# EAGLE board E_KEYPAD_2_2 (EAGLE 6.4)
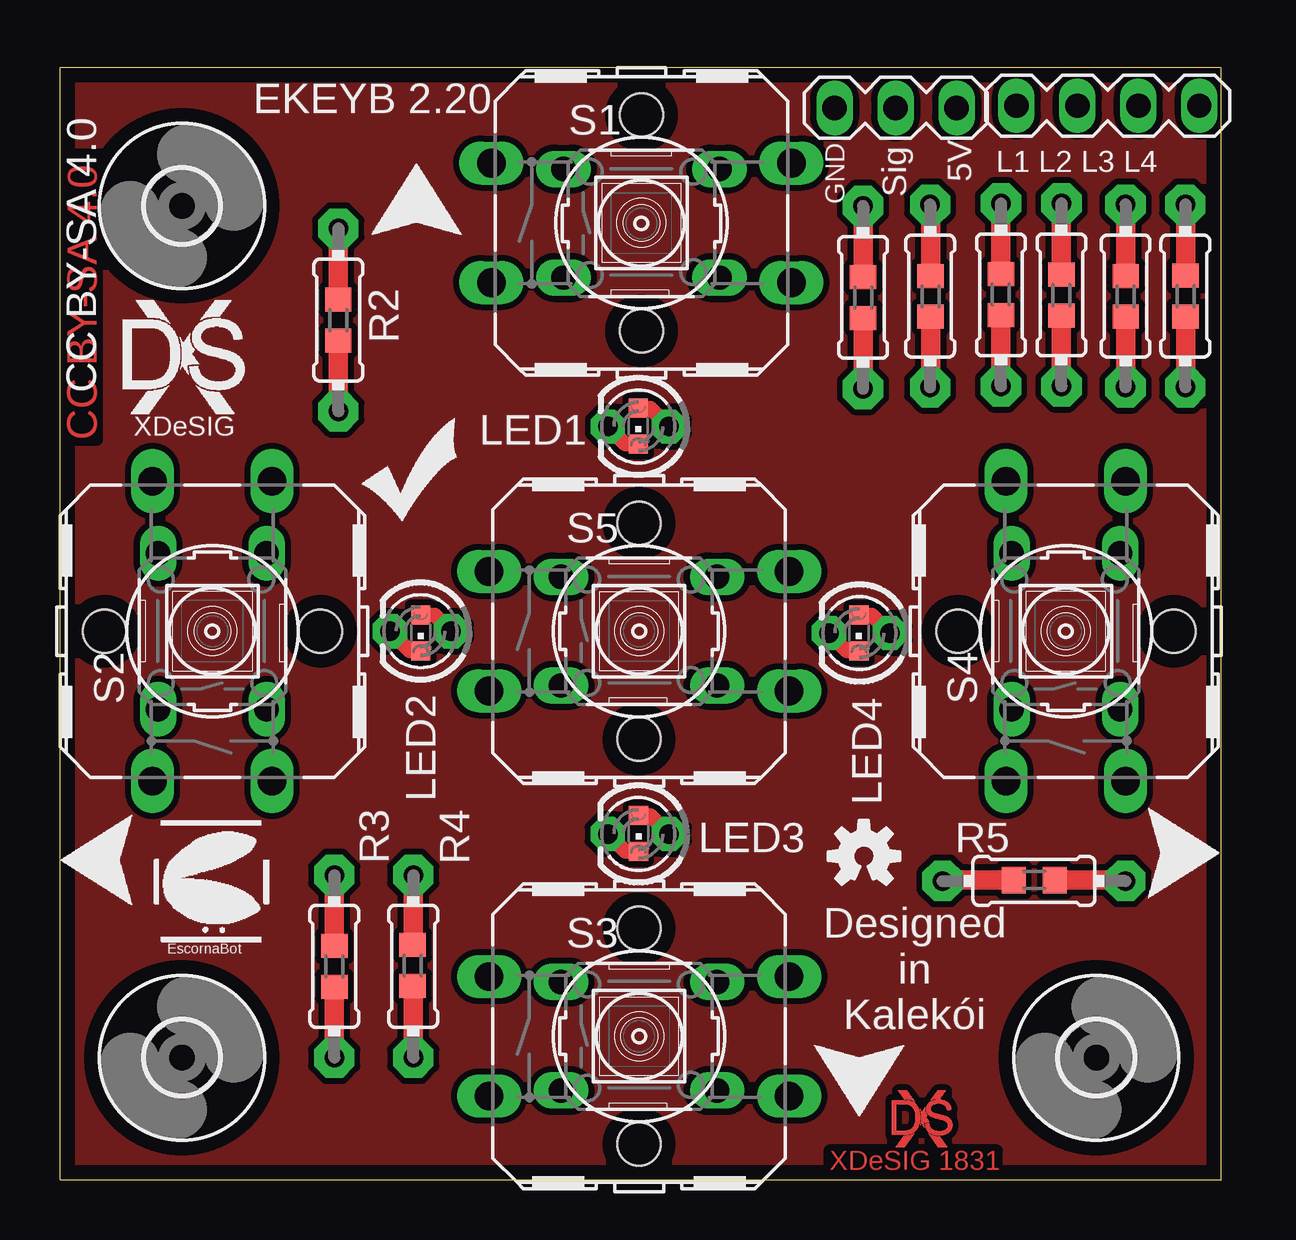
[diagram p0: board, top side]
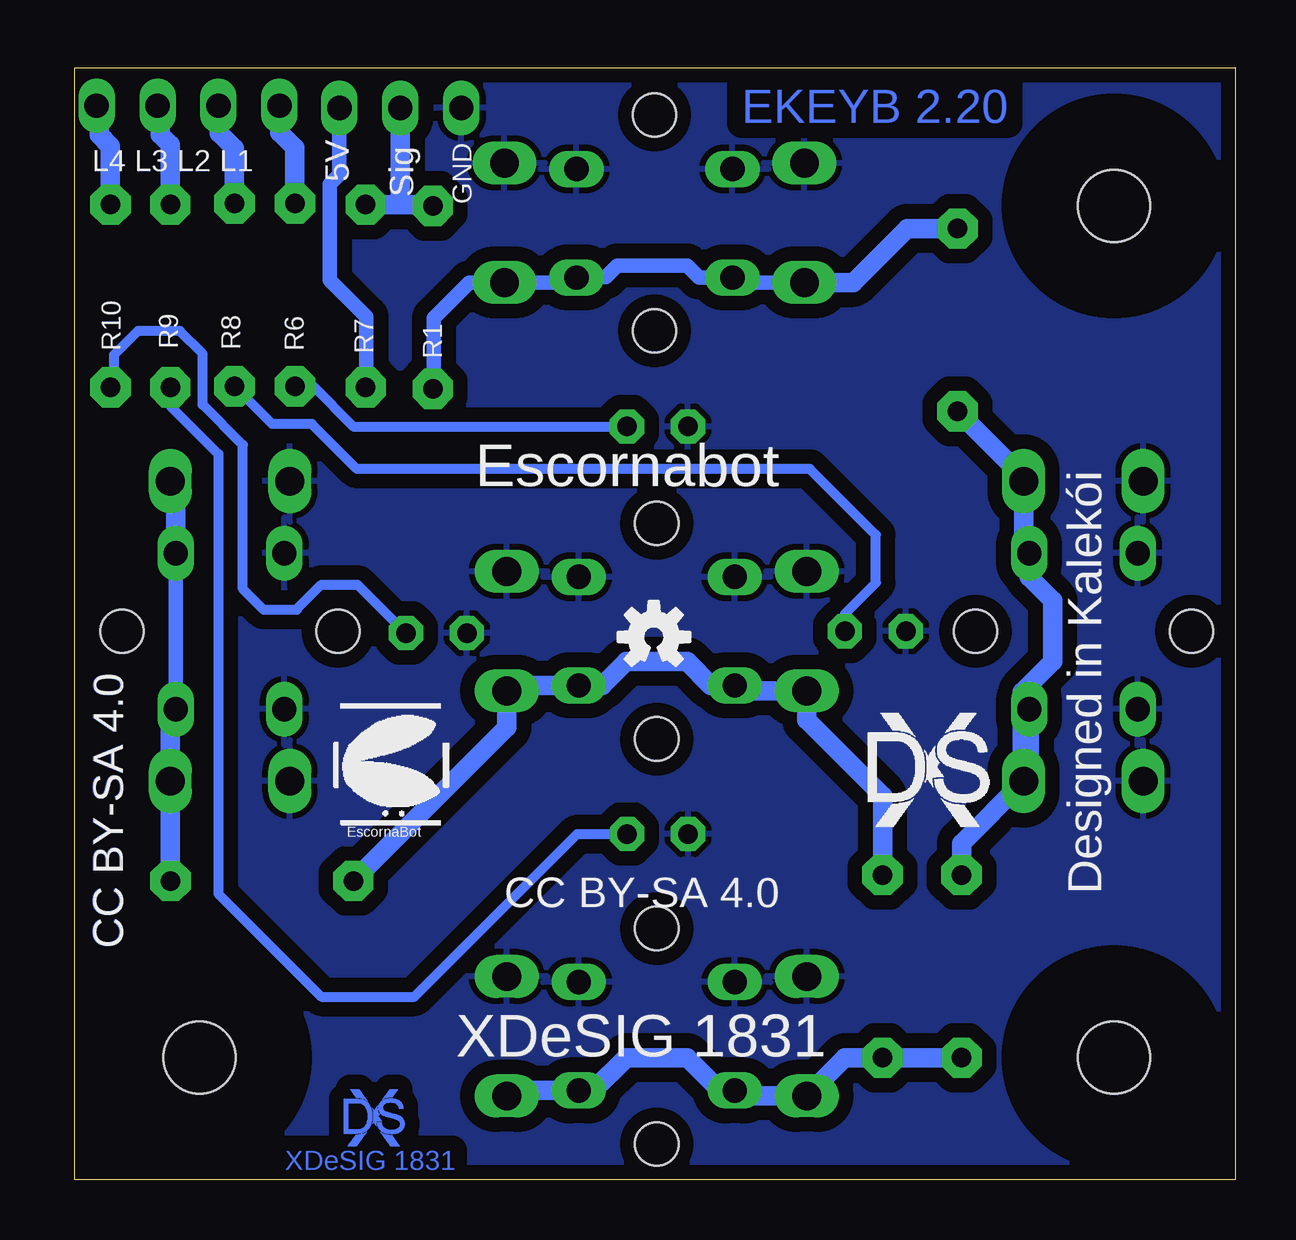
[diagram p1: board, bottom side, seen from below]

Size 48.38 x 46.38 mm. Coordinates in mm from the lower left corner, seen from the top.
Outline: 0,46.34 48.38,46.34 48.38,0 0,0 0,46.38
Copper layers (1*16): Top 0.035mm / dielectric 1.5mm / Bottom 0.035mm
Design rules "default": minimum track width 10mil, minimum drill 22mil, track to track 10mil, track to pad 10mil, pad to pad 8mil, via to via 12mil, smd to smd 8mil, copper to edge 24mil, drill to drill 12mil, minimum pad ring 10mil, minimum via ring 10mil, stop-mask expansion 2mil, vias tented up to drill 30mil, thermal gap 10mil
Net classes: 0 default: width 0.254 mm, drill 0.61 mm, clearance 0.254 mm

## Footprints (pad centres in the part's own frame; a part is rotated, then mirrored left to right if it is on the bottom)
3,0 = hole 3: 0,0
LED3MM = drill 0.813 pad 1.422 octagon: A -1.27,0; K 1.27,0
CHIPLED_0603 = smd 0.8 x 0.8: A 0,-0.75; C 0,0.75
0204/7 = drill 0.813 pad 1.676 octagon: 1 -3.81,0; 2 3.81,0
R0603 = smd 1 x 1.1: 1 -0.85,0; 2 0.85,0
B3F-10XX = drill 1.016 long: 1 -3.251,2.261; 2 3.251,2.261; 3 -3.251,-2.261; 4 3.251,-2.261
B3F-40XX = drill 1.194 pad 1.676 long: 1 -6.248,2.489; 2 6.248,2.489; 3 -6.248,-2.489; 4 6.248,-2.489 | hole 1.803: 0,-4.496; 0,4.496
MA04-1 = drill 1.016 long: 1 -3.81,0; 2 -1.27,0; 3 1.27,0; 4 3.81,0
MA03-1 = drill 1.016 pad 1.27 long: 1 -2.54,0; 2 0,0; 3 2.54,0

## Placement (x,y rotation side)
H1  HOLE3.0  [3,0]  5.08,40.59 0 top
H2  HOLE3.0  [3,0]  43.18,5.08 0 top
H3  HOLE3.0  [3,0]  5.08,5.08 0 top
LED1  [LED3MM]  24.1,31.39 180 top
LED1.1  [CHIPLED_0603]  24.09,31.41 180 top
LED2  [LED3MM]  15.02,22.86 180 top
LED2.1  [CHIPLED_0603]  15.04,22.79 180 top
LED3  [LED3MM]  24.09,14.4 180 top
LED3.1  [CHIPLED_0603]  24.11,14.44 180 top
LED4  [LED3MM]  33.31,22.78 180 top
LED4.1  [CHIPLED_0603]  33.29,22.79 180 top
LOGO1  OSHW-LOGOS  [OSHW-LOGO-S]  33.49,13.48 0 top
LOGO2  OSHW-LOGOS  [OSHW-LOGO-S]  24.25,22.61 0 bottom
R1  10K  [0204/7]  33.46,36.77 90 top
R1.1  10K  [R0603]  33.47,36.77 90 top
R2  10K  [0204/7]  11.6,35.83 90 top
R2.1  10K  [R0603]  11.6,35.83 90 top
R3  10K  [0204/7]  11.43,8.89 90 top
R3.1  10K  [R0603]  11.43,8.89 90 top
R4  10K  [0204/7]  14.72,8.89 270 top
R4.1  10K  [R0603]  14.7,8.93 270 top
R5  22K  [0204/7]  40.58,12.45 180 top
R5.1  22K  [R0603]  40.59,12.49 180 top
R6  1K  [0204/7]  39.2,36.88 270 top
R6.1  1K  [R0603]  39.2,36.9 270 top
R7  10K  [0204/7]  36.26,36.83 90 top
R7.1  10K  [R0603]  36.27,36.82 90 top
R8  1K  [0204/7]  41.73,36.88 270 top
R8.1  1K  [R0603]  41.73,36.87 270 top
R9  1K  [0204/7]  44.4,36.83 270 top
R9.1  1K  [R0603]  44.41,36.82 270 top
R10  1K  [0204/7]  46.89,36.83 90 top
R10.1  1K  [R0603]  46.9,36.83 270 top
S1  [B3F-10XX]  24.23,39.86 0 top
S1.1  [B3F-40XX]  24.23,39.88 0 top
S2  [B3F-10XX]  6.35,22.86 90 top
S2.1  [B3F-40XX]  6.35,22.86 90 top
S3  [B3F-10XX]  24.13,5.97 0 top
S3.1  [B3F-40XX]  24.13,5.97 0 top
S4  [B3F-10XX]  41.91,22.86 90 top
S4.1  [B3F-40XX]  41.91,22.86 90 top
S5  [B3F-10XX]  24.13,22.86 0 top
S5.1  [B3F-40XX]  24.13,22.86 0 top
SV1  [MA04-1]  43.66,44.77 0 top
SV2  [MA03-1]  34.81,44.67 180 top
U$1  ESCORNABOT  [ESCORNA_PEQUE]  37.67,14.7 0 bottom
U$2  ESCORNABOT  [ESCORNA_PEQUE]  3.84,9.83 0 top
U$3  FRECHA  [FRECHA]  3.04,15.24 180 top
U$4  FRECHA  [FRECHA]  16.78,39.34 90 top
U$5  GO  [VALE]  12.53,27.41 0 top
U$6  FRECHA  [FRECHA]  31.38,5.64 270 top
U$7  XDESIG21  [XDESIG]  15.33,14.71 0 bottom
U$8  XDESIG  [XDESIG_CU_2]  34.66,1.35 0 top
U$9  XDESIG21  [XDESIG]  2.63,31.93 0 top
U$10  XDESIG  [XDESIG_CU_2]  37.16,1.4 0 bottom
U$11  FRECHA  [FRECHA]  45.3,11.69 0 top

## Library data of the parts
H1-H3 = holes
LED1 LED1.1 LED2 LED2.1 LED3 LED3.1 LED4 LED4.1 = adafruit
LOGO1 LOGO2 = SparkFun-Aesthetics
R1 R1.1 R2 R2.1 R3 R3.1 R4 R4.1 R5 R5.1 R6 R6.1 R7 R7.1 R8 R8.1 R9 R9.1 R10 R10.1 = rcl
S1-S5 = switch-omron; MPN: B3F-1000; OC_FARNELL: 176432; OC_NEWARK: 36M3542
S1.1 S2.1 S3.1 S4.1 S5.1 = switch-omron; MF: OMRON COMPONENTS USA; MPN: B3F-4000; OC_FARNELL: 176434; OC_NEWARK: 36K3105
SV1 SV2 = con-lstb; OC_FARNELL: unknown; OC_NEWARK: unknown
U$1-U$6 U$11 = escorna
U$7-U$10 = xdesig

## Nets
5V: R7.1 R7.1.1 SV2.1
A0: R6.1 R6.1.1 SV1.1
A1: R8.1 R8.1.1 SV1.2
A2: R9.1 R9.1.1 SV1.3
A3: R10.1.1 R10.2 SV1.4
GND: LED1.1.C LED1.K LED2.1.C LED2.K LED3.1.C LED3.K LED4.1.C LED4.K S1.1 S1.1.1 S1.1.2 S1.2 S2.1 S2.1.1 S2.1.2 S2.2 S3.1 S3.1.1 S3.1.2 S3.2 S4.1 S4.1.1 S4.1.2 S4.2 S5.1 S5.1.1 S5.1.2 S5.2 SV2.3
N$4: LED2.1.A LED2.A R8.1.2 R8.2
N$5: LED1.1.A LED1.A R6.1.2 R6.2
N$6: LED3.1.A LED3.A R9.1.2 R9.2
N$8: LED4.1.A LED4.A R10.1 R10.1.2
S1: R1.1 R1.1.1 R2.1.2 R2.2 S1.1.3 S1.1.4 S1.3 S1.4
S2: R2.1 R2.1.1 R3.1.2 R3.2 S2.1.3 S2.1.4 S2.3 S2.4
S3: R3.1 R3.1.1 R4.1.2 R4.2 S3.1.3 S3.1.4 S3.3 S3.4
S4: R5.1 R5.1.1 S4.1.3 S4.1.4 S4.3 S4.4
S5: R4.1 R4.1.1 R5.1.2 R5.2 S5.1.3 S5.1.4 S5.3 S5.4
SIG: R1.1.2 R1.2 R7.1.2 R7.2 SV2.2

## Tracks (layer width: path | path; a pad name or v marks a point on that pad's centre or on a via)
5V
  Top 0.813: 36.23,33.05 R7.1 36.27,33.04 R7.1.1
  Bottom 0.61: SV2.1 37.35,41.9 37.75,41.5 37.75,37.49 36.23,35.97 36.23,33.05 R7.1
A0
  Top 0.813: 39.26,40.64 R6.1 R6.1.1
  Bottom 0.813: SV1.1 39.83,44.74 39.83,43.64 39.2,43.02 R6.1
A1
  Top 0.813: R8.1.1 R8.1
  Bottom 0.813: SV1.2 42.35,44.73 42.35,43.62 41.73,42.99 R8.1
A2
  Top 0.813: R9.1.1 R9.1
  Bottom 0.813: SV1.3 44.83,44.66 44.83,43.55 44.4,43.13 R9.1
A3
  Top 0.813: 46.75,40.63 R10.2 R10.1.1
  Bottom 0.813: SV1.4 47.37,44.66 47.37,43.55 46.89,43.08 R10.2
GND
  Top 0.61: LED4.1.C 32.78,22.04 LED4.K | LED2.1.C 14.57,22.04 LED2.K | LED3.1.C 23.55,13.69 LED3.K | LED1.1.C 23.56,30.66 LED1.K
  pour Bottom (isolate 0.61): 0,46.99 50.8,46.99 50.8,0 0,0
N$1
  pour Top: 0,46.99 48.26,46.99 48.26,0 0,0
N$4
  Top 0.61: LED2.1.A 15.61,23.54 LED2.A
  Top 0.813: R8.1.2 R8.2
  Bottom 0.406: LED2.A 16.29,23.59 15,24.88 15,26.88 17.75,29.62 36.62,29.62 38.5,31.5 40.16,31.5 R8.2
N$5
  Top 0.61: LED1.1.A 24.6,32.16 LED1.A
  Top 0.813: 39.26,33.12 R6.2 R6.1.2
  Bottom 0.406: R6.2 38.45,33.07 36.75,31.38 25.39,31.38 LED1.A
N$6
  Top 0.61: LED3.1.A 24.59,15.19 LED3.A
  Top 0.813: R9.1.2 R9.2
  Bottom 0.406: R9.2 44.4,32.25 42.4,30.25 42.4,11.92 38.1,7.62 34.23,7.62 27.45,14.4 LED3.A
N$8
  Top 0.61: LED4.1.A 33.82,23.54 LED4.A
  Top 0.813: 46.75,33.03 R10.1 R10.1.2
  Bottom 0.406: 34.78,22.78 LED4.A 36.6,24.8 38.1,24.8 39.12,23.77 39.12,23.75 40.5,23.75 41.38,24.62 41.38,30.62 43.05,32.3 43.05,34.42 44,35.38 45.75,35.38 46.75,34.38 46.75,33.03 R10.1
S1
  Top 0.813: 33.41,33.05 R1.1 R1.1.1 | R2.1.2 R2.2
  Bottom 0.61: R1.1 33.41,33.01 33.41,35.91 31.94,37.39 S1.1.4 27.68,37.39 S1.4 27.45,37.62 26.25,37.62 25.77,38.1 22.86,38.1 22.36,37.6 S1.3 20.77,37.39 S1.1.3
  Bottom 0.813: S1.1.3 15.95,37.39 13.7,39.64 R2.2
S2
  Top 0.813: R3.2 R3.1.2 | R2.1.1 R2.1
  Bottom 0.61: 8.89,16.51 8.89,16.56 S2.1.3
  Bottom 0.813: S2.3 8.61,16.79 8.89,16.51 8.89,20.32 7.62,21.59 7.62,24.13 8.61,25.12 S2.4 8.84,26.34 S2.1.4 8.84,29.26 R2.1 | R3.2 11.43,14.02 S2.1.3
S3
  Top 0.61: 14.72,8.05 R4.1.2
  Top 0.813: R3.1.1 R3.1 | 14.72,8.05 R4.2
  Bottom 0.813: R3.1 R4.2 16.29,5.08 S3.1.3 20.65,3.49 S3.3 21.49,3.71 22.86,5.08 25.4,5.08 26.77,3.71 S3.4 30.15,3.71 S3.1.4
S4
  Top 0.813: R5.1.1 44.35,12.49 R5.1
  Bottom 0.61: S4.3 S4.4
  Bottom 0.813: S4.3 44.4,19.38 S4.1.3 R5.1 | S4.4 44.17,28.88 S4.1.4
S5
  Top 0.61: 14.72,9.8 R4.1.1
  Top 0.813: R5.1.2 36.81,12.49 R5.2 | 14.72,9.8 R4.1
  Bottom 0.813: R4.1 14.72,15.99 17.88,19.15 S5.1.3 20.65,20.37 S5.3 21.87,20.6 22.86,21.59 25.4,21.59 26.39,20.6 S5.4 30.15,20.6 S5.1.4 30.38,18.84 R5.2
SIG
  Top 0.813: 33.41,40.51 R1.2 R1.1.2 | 36.23,40.61 R7.2 36.27,40.62 R7.1.2
  Bottom 0.813: R7.2 34.75,40.64 | 34.75,40.64 33.52,40.64 R1.2 | SV2.2 34.81,40.7 34.75,40.64

## Text on the board
Top: CC BY-SA 4.0 | XDeSIG 1831
Bottom: EKEYB 2.20 | CC BY-SA 4.0 | XDeSIG 1831
tPlace: EKEYB 2.20 | CC BY-SA 4.0 | GND | 5V | L1 L2 L3 L4 | Sig | XDeSIG | Designed / in / Kalekói
bPlace: GND | 5V | L4 L3 L2 L1 | Sig | Escornabot | CC BY-SA 4.0 | Designed in Kalekói | CC BY-SA 4.0 | XDeSIG 1831
Measures: Creative commons. Attribution-ShareAlike 4.0 / International (CC BY-SA 4.0)
Document: Creative Commons Recoñecemento 4.0 Internacional (CC BY 4.0)